# Altium PCB obc.PcbDoc
Units mm, origin at the board's own origin, x right, y up, seen from the top; angles counter-clockwise.
Board outline 60 x 35 mm, 4 copper layers (Top Layer, GND, +3V3, Bottom Layer), stack 0.463 mm thick; 77 components, 67 nets, 306 pads, 141 vias.
Unrouted connection lines stored in the file: 86.
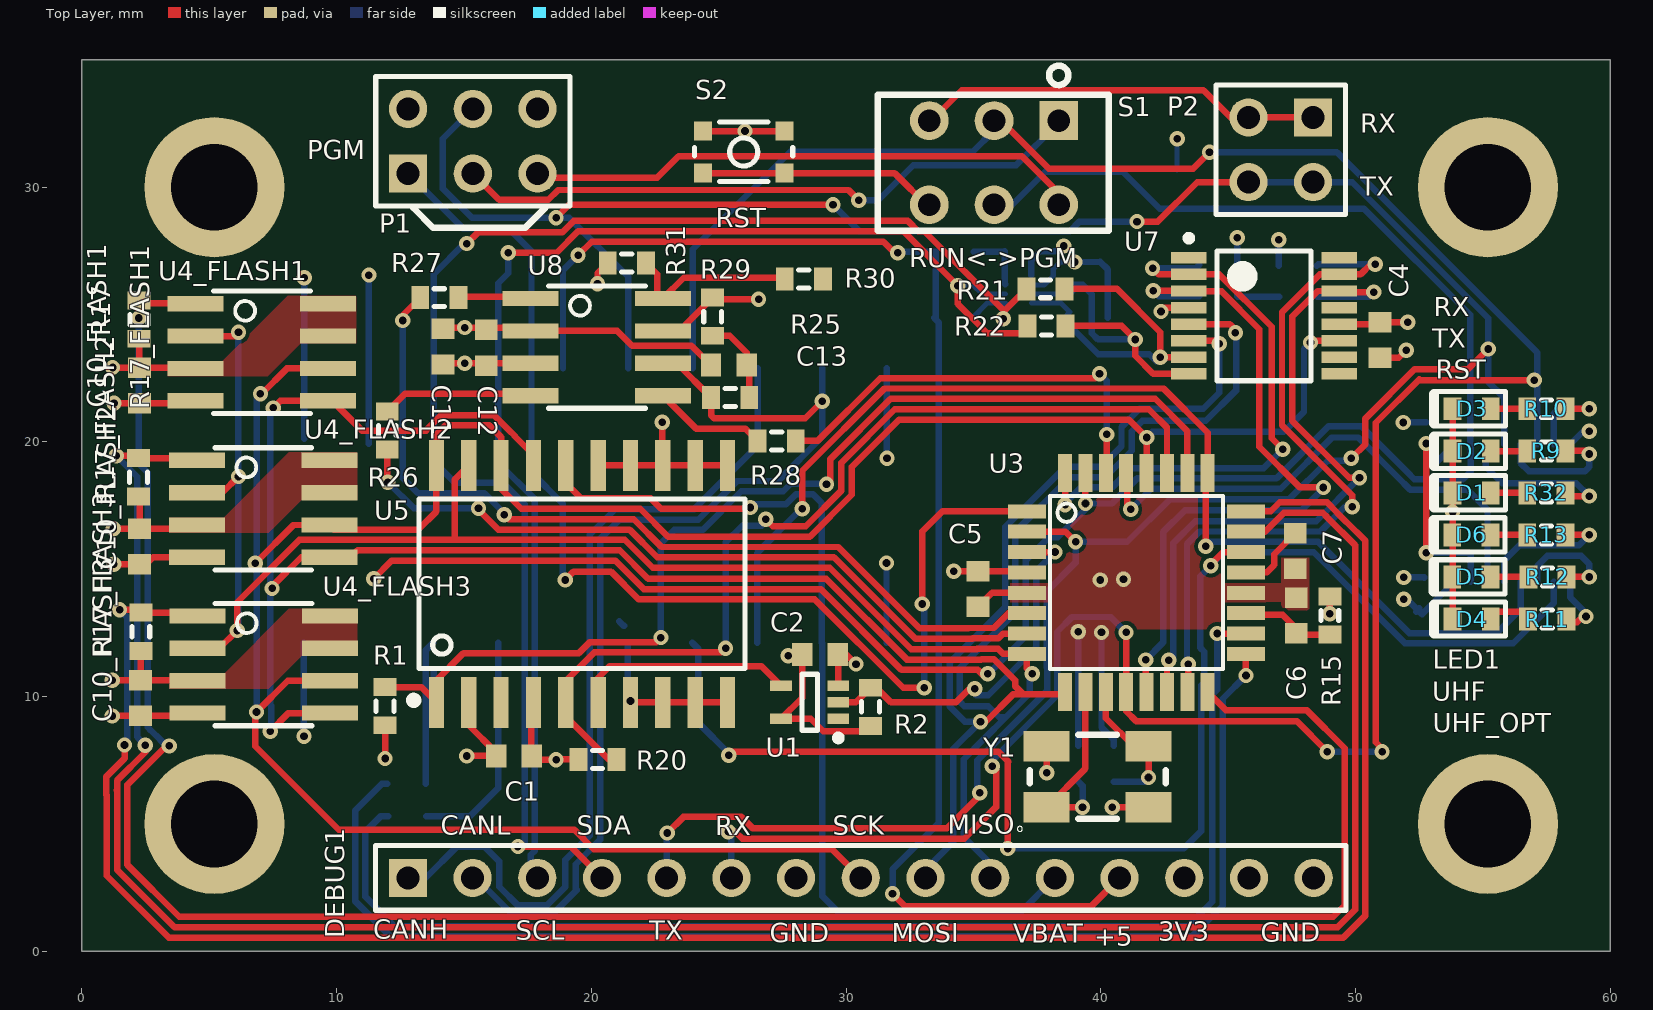
[diagram p0: Top Layer view]
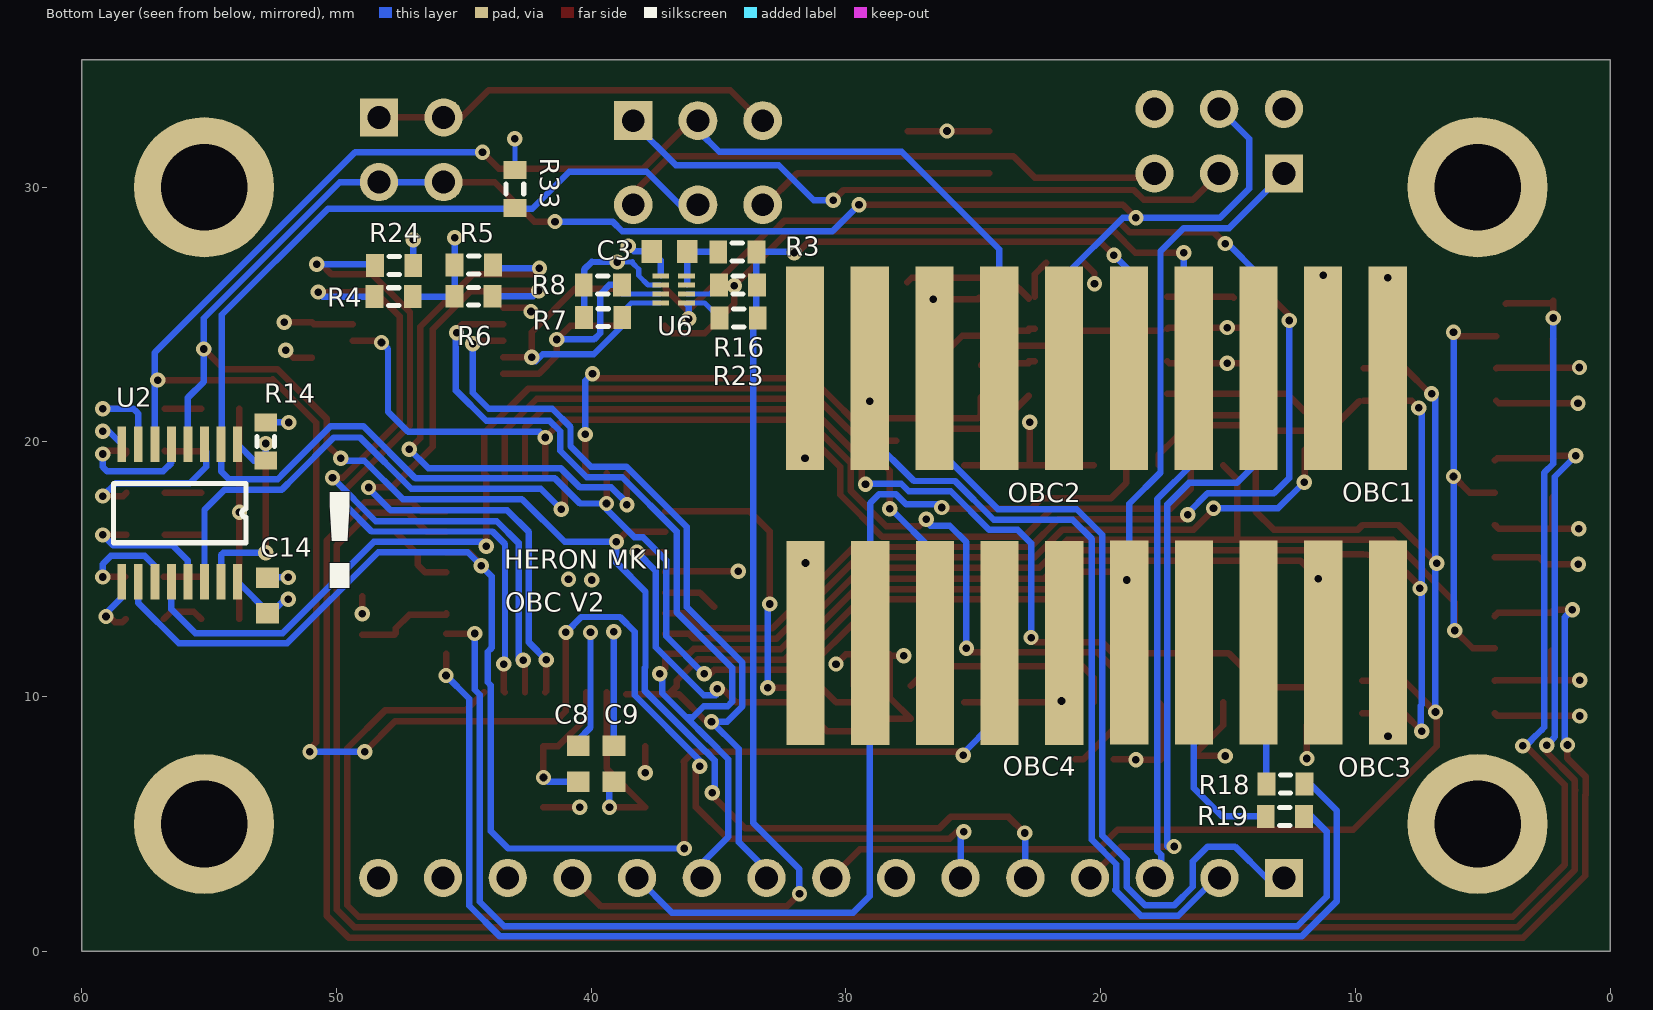
[diagram p1: Bottom Layer view, seen from below]
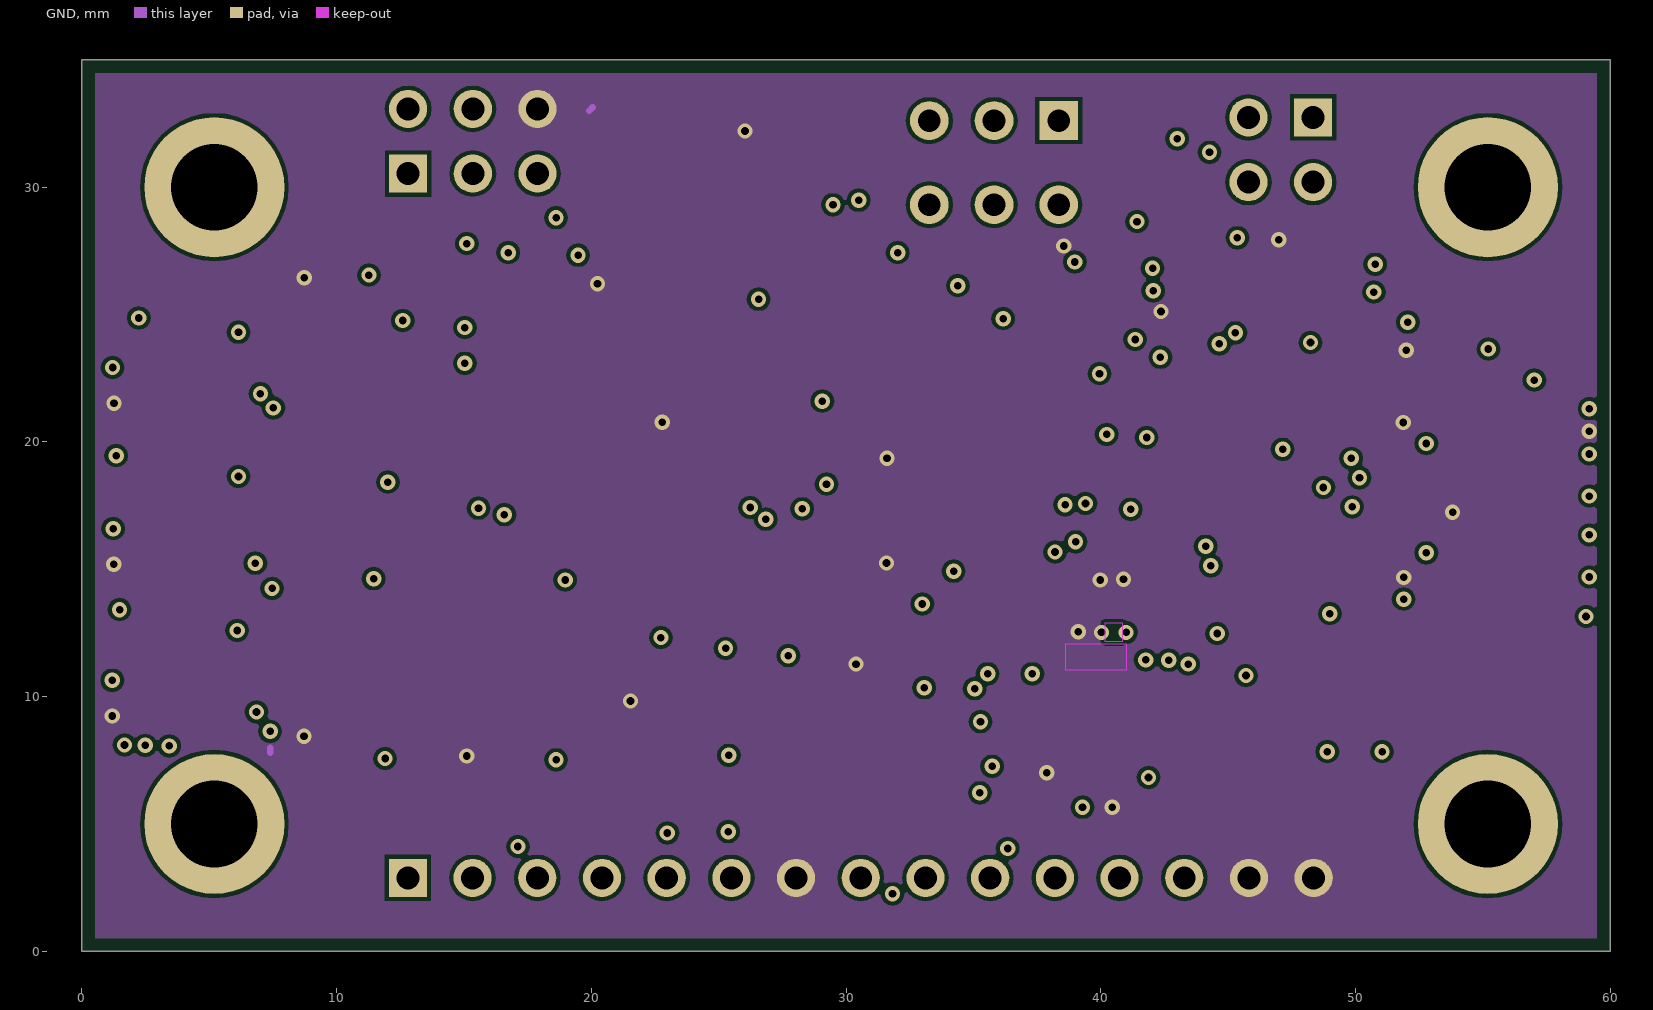
[diagram p2: GND]
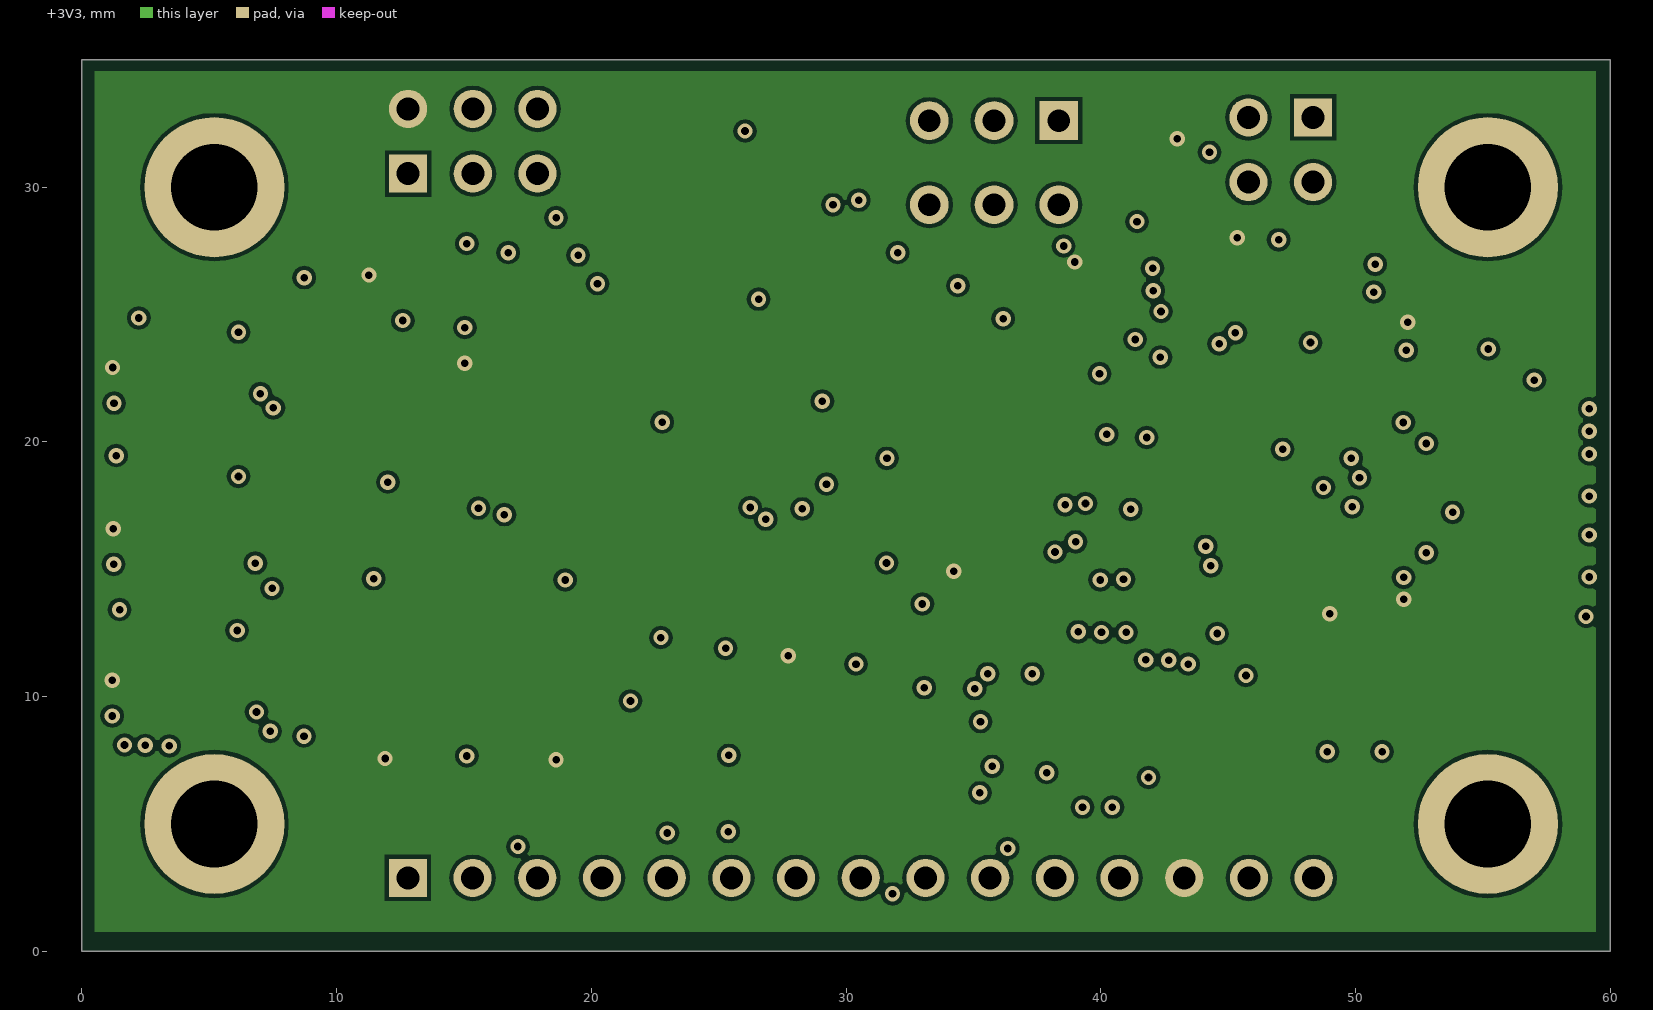
[diagram p3: +3V3]

## Layer stack, top to bottom
Top Solder: solder mask 0.0102, Solder Resist, Dk 3.5
Top Layer: signal copper 0.0356
GND: signal copper 0.036
+3V3: signal copper 0.036
Dielectric 1: dielectric 0.32, FR-4, Dk 4.8
Bottom Layer: signal copper 0.0356
Bottom Solder: solder mask 0.0102, Solder Resist, Dk 3.5

## Board outline
0,0 0,35 60,35 60,0

## Design rules (kind name [scope] priority, off if disabled: settings)
AssemblyTestPointUsage [All] p1 off:
AssemblyTestpoint [All] p1 off: testpointundercomponent=TRUE minsize=1.016 maxsize=2.54 preferedsize=1.524 minholesize=0 maxholesize=1.016 preferedholesize=0.813 testpointgrid=0.025 usegrid=TRUE gridtolerance=0 allowsidetop=TRUE allowsidebottom=TRUE
BoardOutlineClearance [OnLayer('VCC') or OnLayer('GND')] p1: gap=0.508 ignorepadtopadclearanceinfootprint=FALSE // Inner layer clearance
BoardOutlineClearance BoardOutlineClearance_1 [All] p2: gap=0.381 ignorepadtopadclearanceinfootprint=FALSE // top and bottom layers
Clearance [All] p1: gap=0.152 ignorepadtopadclearanceinfootprint=FALSE
FabricationTestPointUsage [All] p1 off: valid=0 allowmultiple=FALSE
FabricationTestpoint [All] p1 off: side=3 testpointundercomponent=FALSE minsize=1.016 maxsize=2.54 preferedsize=1.524 minholesize=0 maxholesize=1.016 preferedholesize=0.813 testpointgrid=0.025 allowsidetop=TRUE allowsidebottom=TRUE usegrid=TRUE gridtolerance=0
Height [All] p1: minheight=0 maxheight=15 prefheight=12.7
HoleSize [All] p1: absolutevalues=TRUE maxlimit=6.3 minlimit=0.3 maxpercent=80.000 minpercent=20.000
HoleToHoleClearance [All] p1: gap=0.254 allowstackedmicrovias=FALSE
MinimumAnnularRing [All] p1: minimumring=0.15
MinimumSolderMaskSliver [All] p1: minsoldermaskwidth=0.102
PlaneConnect [All] p1: planeconnectstyle=Direct reliefexpansion=0.508 reliefentries=4 reliefconductorwidth=0.254 reliefairgap=0.254
PolygonConnect [All] p1: connectstyle=Direct reliefconductorwidth=0.254 reliefentries=4 polygonreliefangle="90 Angle" airgapwidth=0.254
RoomDefinition ATMega32M1 [InComponentClass('ATMega32M1')] p1: confinementstyle=ConfineIn formatcopy=TRUE lockcomponents=FALSE outline 34.325,12.72 34.325,15.728 36.035,15.728 36.035,19.845 42.148,19.845 42.148,31.435 43.856,31.435 43.856,19.845 46.769,19.845 46.769,17.225 48.492,17.225 48.492,14.691 49.851,14.691 49.851,11.683 46.769,11.683 46.769,9.111 43.446,9.111 43.446,4.29 36.31,4.29 36.31,9.111 36.035,9.111 36.035,12.72
RoomDefinition U_obc_spi_to_i2c [InComponentClass('U_obc_spi_to_i2c')] p2: confinementstyle=ConfineIn formatcopy=TRUE lockcomponents=FALSE outline 32.71,24.013 32.71,25.721 32.735,25.721 32.735,27.016 32.761,27.016 32.761,28.311 35.428,28.311 35.428,28.337 42.231,28.337 42.231,28.504 50.589,28.504 50.589,25.505 51.818,25.505 51.818,22.497 50.589,22.497 50.589,21.871 42.231,21.871 42.231,23.7 36.367,23.7 36.367,24.013
RoomDefinition obc_main_3.0 [InComponentClass('obc_main_3.0')] p3: confinementstyle=ConfineIn formatcopy=TRUE lockcomponents=FALSE outline 7.652,7.804 7.652,16.439 7.663,16.439 7.663,27.207 20.379,27.207 20.379,27.21 32.674,27.21 32.674,4.509 49.984,4.509 49.984,1.261 11.176,1.261 11.176,7.804
RoomDefinition FLASH3 [InComponentClass('FLASH3')] p4: confinementstyle=ConfineIn formatcopy=TRUE lockcomponents=FALSE outline 1.444,8.439 1.444,11.447 1.462,11.447 1.462,14.052 3.17,14.052 3.17,14.016 11.153,14.016 11.153,8.505 3.152,8.505 3.152,8.439
RoomDefinition FLASH2 [InComponentClass('FLASH2')] p5: confinementstyle=ConfineIn formatcopy=TRUE lockcomponents=FALSE outline 1.366,17.109 1.366,20.117 3.104,20.117 3.104,20.129 11.139,20.129 11.139,14.618 3.119,14.618 3.119,14.392 1.411,14.392 1.411,17.109
RoomDefinition FLASH1 [InComponentClass('FLASH1')] p6: confinementstyle=ConfineIn formatcopy=TRUE lockcomponents=FALSE outline 1.386,23.296 1.386,26.304 3.094,26.304 3.094,26.276 11.088,26.276 11.088,20.765 3.115,20.765 3.115,20.716 1.407,20.716 1.407,23.296
RoomDefinition U_obc_rtc [InComponentClass('U_obc_rtc')] p7: confinementstyle=ConfineIn formatcopy=TRUE lockcomponents=FALSE outline 11.051,8.123 11.051,11.131 12.476,11.131 12.476,20.395 26.388,20.395 26.388,12.513 30.485,12.513 30.485,11.408 30.654,11.408 30.654,11.105 31.817,11.105 31.817,8.097 30.654,8.097 30.654,7.875 21.748,7.875 21.748,6.681 18.74,6.681 18.74,6.817 15.463,6.817 15.463,8.123
RoomDefinition U_micro-circuit-ATMEGA32M1 [InComponentClass('U_micro-circuit-ATMEGA32M1')] p8: confinementstyle=ConfineIn formatcopy=TRUE lockcomponents=FALSE outline 10.015,28.912 10.015,34.7 30.858,34.7 30.858,35.154 40.688,35.154 40.688,34.364 50.618,34.364 50.618,28.576 40.688,28.576 40.688,27.915 30.858,27.915 30.858,28.912
RoomDefinition U_can-SN65HVD233 [InComponentClass('U_can-SN65HVD233')] p9: confinementstyle=ConfineIn formatcopy=TRUE lockcomponents=FALSE outline 11.135,18.943 11.135,21.951 12.529,21.951 12.529,26.517 19.891,26.517 19.891,27.883 22.899,27.883 22.899,27.253 29.85,27.253 29.85,25.545 28.784,25.545 28.784,19.187 12.843,19.187 12.843,18.943
RoomDefinition micro-circuit- [InComponentClass('micro-circuit-')] p10: confinementstyle=ConfineIn formatcopy=TRUE lockcomponents=FALSE outline 51.943,11.938 59.182,11.938 59.182,22.352 51.943,22.352
RoutingVias [All] p1: holewidth=0.3 width=0.6 viastyle="Through Hole" minholewidth=0.2 minwidth=0.6 maxholewidth=6.3 maxwidth=10
SilkToSilkClearance [All] p1: silktosilkclearance=0
SilkToSolderMaskClearance [IsPad] p1: minsilkscreentomaskgap=0.076 clearancetoexposedcopper=TRUE
SolderMaskExpansion [All] p1: expansion=0.064
UnConnectedPin [All] p1:
UnRoutedNet [All] p1: checkbadconnections=TRUE
Width [All] p1: maxlimit=2.54 minlimit=0.152 preferedwidth=0.254
18 further rules are at their usual default settings.

## Classes and differential pairs
component class U_obc_spi_to_i2c: C3 C4 R3 R4 R5 R6 R7 R8 R16 R21 R22 R23 R24 U6 U7
channel class obc_flash: FLASH1 FLASH2 FLASH3
component class micro-circuit-: C14 D1 D2 D3 D4 D5 D6 R9 R12 R14 R26 R27 R29 R32 U2
component class ATMega32M1: C5 C6 C7 C8 C9 R15 R33 U3 Y1
net class CS_MEM[1..3]: CS_MEM1 CS_MEM2 CS_MEM3
component class U_obc_rtc: C1 C2 R1 R2 R20 U1 U5
component class U_can-SN65HVD233: C11 C12 C13 R25 R26 R27 R28 R29 R30 R31 U8
component class U_micro-circuit-ATMEGA32M1: P1 P2 P3 S1 S2
component class obc_main_3.0: DEBUG1 OBC1 OBC2 OBC3 OBC4 R18 R19
component class FLASH3: C10_FLASH3 R17_FLASH3 R33_FLASH3 U4_FLASH3
component class FLASH2: C10_FLASH2 R17_FLASH2 R33_FLASH2 U4_FLASH2
component class FLASH1: C10_FLASH1 R17_FLASH1 R33_FLASH1 U4_FLASH1

## Components (designator, comment, footprint, x,y, rotation, side; value= is the part's Value field where it differs from the comment)
C1 "0.1uF" 1608[0603] 16.967,7.671 r0 top
C2 "0.1uF" 1608[0603] 28.981,11.659 r180 top
C3 "0.1uF" 1608[0603] 36.932,27.483 r180 bottom
C4 "0.1uF" 1608[0603] 50.964,24.001 r90 top
C5 "0.1uF" 1608[0603] 35.179,14.224 r90 top
C6 "0.1uF" 1608[0603] 47.676,13.187 r270 top value=100nF
C7 "0.1uF" 1608[0603] 47.638,15.721 r270 top
C8 "15pF 1%" 1608[0603] 40.513,7.366 r270 bottom value="14pF 1%"
C9 "15pF 1%" 1608[0603] 39.116,7.366 r270 bottom value="14pF 1%"
C10_FLASH1 "0.1uF" 1608[0603] 2.261,22.22 r270 top (schematic designator C10)
C10_FLASH2 "0.1uF" 1608[0603] 2.265,15.896 r270 top (schematic designator C10)
C10_FLASH3 "0.1uF" 1608[0603] 2.298,9.943 r270 top (schematic designator C10)
C11 "10uF" 1608[0603] 14.173,23.738 r90 top
C12 "0.1uF" 1608[0603] 15.875,23.698 r90 top
C13 "47pF" 1608[0603] 25.4,23.012 r0 top
C14 "0.1uF" 1608[0603] 52.705,13.97 r270 bottom
D1 "GREEN LED" 0603-LED 54.565,18.001 r180 top
D2 "ORANGE LED" 0603-LED 54.565,19.637 r180 top
D3 "ORANGE LED" 0603-LED 54.565,21.303 r180 top
D4 "" 0603-LED 54.565,13.048 r180 top
D5 "" 0603-LED 54.553,14.699 r180 top
D6 "" 0603-LED 54.553,16.35 r180 top
DEBUG1 "Header 15" HDR1X15 12.8,2.885 r0 top
OBC1 "X- Y+" 70AAJ-5-M0 18.89,22.89 r180 bottom
OBC2 "X+ Y+" 70AAJ-5-M0 31.607,22.892 r180 bottom
OBC3 "X- Y-" 70AAJ-5-M0 18.88,12.122 r180 bottom
OBC4 "X+ Y-" 70AAJ-5-M0 31.59,12.11 r180 bottom
P1 "Header 3X2" HDR2X3 12.809,30.536 r0 top
P2 "Header 2X2" HDR2X2 48.34,32.74 r180 top
R1 "10K" J1-0603 11.905,9.627 r270 top
R2 "10K" J1-0603 30.963,9.601 r270 top
R3 "200K" J1-0603 34.265,27.457 r180 bottom
R4 "10K" J1-0603 47.756,25.705 r180 bottom
R5 "10K" J1-0603 44.615,26.949 r0 bottom
R6 "10K" J1-0603 44.622,25.719 r0 bottom
R7 "4.7K" J1-0603 39.532,24.88 r0 bottom
R8 "4.7K" J1-0603 39.548,26.162 r0 bottom
R9 "330" J1-0603 57.498,19.652 r0 top
R10 "330" J1-0603 57.498,21.303 r0 top
R11 "330" J1-0603 57.531,13.048 r0 top
R12 "330" J1-0603 57.543,14.699 r0 top
R13 "330" J1-0603 57.498,16.35 r0 top
R14 "10K" J1-0603 52.781,20.015 r270 bottom
R15 "30K" J1-0603 48.997,13.187 r90 top value=10
R16 "4.7K" J1-0603 34.239,26.162 r180 bottom
R17_FLASH1 "10K" J1-0603 2.24,24.8 r270 top (schematic designator R17)
R17_FLASH2 "10K" J1-0603 2.22,18.613 r270 top (schematic designator R17)
R17_FLASH3 "10K" J1-0603 2.316,12.548 r270 top (schematic designator R17)
R18 "100" J1-0603 12.744,6.571 r180 bottom
R19 "100" J1-0603 12.773,5.298 r180 bottom
R20 "10K" J1-0603 20.244,7.535 r180 top
R21 "Res3" J1-0603 37.833,26.01 r180 top value="0 Ohm"
R22 "Res3" J1-0603 37.871,24.554 r180 top value="0 Ohm"
R23 "4.7K" J1-0603 34.214,24.867 r180 bottom
R24 "10K" J1-0603 47.737,26.924 r0 bottom
R25 "60" J1-0603 25.451,21.745 r0 top
R26 "100" J1-0603 11.989,20.447 r270 top
R27 "100" J1-0603 14.033,25.663 r180 top
R28 "100" J1-0603 27.28,20.041 r0 top
R29 "60" J1-0603 24.765,24.917 r270 top
R30 "0" J1-0603 28.346,26.399 r180 top
R31 "0" J1-0603 21.395,27.029 r0 top
R32 "330" J1-0603 57.498,18.001 r0 top
R33 "30K" J1-0603 43.002,29.931 r90 bottom
S1 "DPDT" "JS202011AQN - Slide Switch" 35.811,30.963 r270 top
S2 "SW-PB" "PTS830GM140 SMTR LFS - Pushbutton" 25.984,31.381 r180 top
U1 "SN74LVC1G07" SOT65P210X110-5N 28.575,9.779 r180 top
U2 "Hex Buffer" SOP65P640X120-16N 53.885,19.906 r270 bottom
U3 "ATMega32M1" QFP80P900X900X120-32 41.402,14.478 r0 top
U4_FLASH1 "SST26VF016B" SOIC127P500X600-8N 7.07,23.52 r270 top (schematic designator U4)
U4_FLASH2 "SST26VF016B" SOIC127P500X600-8N 7.121,17.374 r270 top (schematic designator U4)
U4_FLASH3 "SST26VF016B" SOIC127P500X600-8N 7.136,11.26 r270 top (schematic designator U4)
U5 "DS3234" SOIC127P1032X265-20 19.634,14.427 r90 top
U6 "PCA9306DQER" SON35P100X140X40-8N 36.768,25.984 r180 bottom
U7 "SC18IS600IPW/S8HP" TSOP65P640X110-16N 46.41,24.95 r0 top
U8 "SN65HVD233D" SOIC127P500X600-8N 20.218,23.724 r270 top
Y1 "8MHz Crystal" OSCSC500X320X110-4N 39.878,6.858 r90 top

## Footprints (in the part's own frame and the unit in brackets; to place one, negate y for a bottom-side part, rotate by r counter-clockwise, add the part's x,y. Pads: shape width x height; smd on the part's side, far side on the other; paste and mask are expansions set on the pad)
70AAJ-5-M0 [mm] "5 Pin Butterfly Connecter"
  rect 1.5x8 smd: 1(0,0) 2(2.54,0) 3(5.08,0) 4(7.62,0) 5(10.16,0)
0603-LED [mm] "0603 LED footprint, thick line on the cathode"
  rect 0.7x0.9 smd: 1(-0.75,0) 2(0.75,0)
  silkscreen extent -1.32,-0.67 1.5,0.67, body extent -0.8,-0.4 0.8,0.4, height 0.71
1608[0603] [mm] "Chip Capacitor, Body 1.6x0.8mm, IPC High Density"
  rect 0.8x0.9 smd: 1(-0.7,0) 2(0.7,0)
  body extent -0.87,-0.48 0.87,0.48, height 1.3
HDR1X15 [mm] "Connector; Header; 15 Position"
  rect 1.5x1.5 hole 0.9: 1(0,0)
  round 1.5 hole 0.9: 2(2.54,0) 3(5.08,0) 4(7.62,0) 5(10.16,0) 6(12.7,0) 7(15.24,0) 8(17.78,0) 9(20.32,0) 10(22.86,0) 11(25.4,0) 12(27.94,0) 13(30.48,0) 14(33.02,0) 15(35.56,0)
  silkscreen extent -1.27,-1.27 36.83,1.27
HDR2X2 [mm] "Connector; Header; 2x2 Position"
  rect 1.5x1.5 hole 0.9: 1(0,0)
  round 1.5 hole 0.9: 2(0,2.54) 3(2.54,0) 4(2.54,2.54)
  silkscreen extent -1.27,-1.27 3.81,3.81
HDR2X3 [mm] "Connector; Header; 3x2 Position"
  rect 1.5x1.5 hole 0.9: 1(0,0)
  round 1.5 hole 0.9: 2(0,2.54) 3(2.54,0) 4(2.54,2.54) 5(5.08,0) 6(5.08,2.54)
  silkscreen extent -1.27,-1.27 6.35,3.81
J1-0603 [mm] "Chip Resistor, Body 1.6x0.8mm, IPC High Density"
  rect 0.7x0.9 smd: 1(-0.75,0) 2(0.75,0)
  silkscreen extent -0.2,-0.35 0.2,0.35, body extent -0.85,-0.48 0.85,0.48, height 0.9
"JS202011AQN - Slide Switch" [mil]
  rect 60x60 hole 35: 1(-65,100)
  round 60 hole 35: 2(-65,0) 3(-65,-100) 4(65,100) 5(65,0) 6(65,-100)
  silkscreen extent -150,-180 105,177, body extent -148,-178 73,176, height 139
OSCSC500X320X110-4N [mm] "ABM3B-8.000MHZ-10-D-1-G-T Abracon 8MHz crystal"
  rect 1.2x1.8 smd: 1(-1.2,2) 2(-1.2,-2) 3(1.2,-2) 4(1.2,2)
  silkscreen extent -2.15,-2.67 1.65,3.15, body extent -1.6,-2.5 1.58,2.5, height 1.1
"PTS830GM140 SMTR LFS - Pushbutton" [mm] "Low profile pushbutton"
  rect 0.7x0.75 smd: 1(-1.6,0.825) 1(1.6,0.825) 2(-1.6,-0.825) 2(1.6,-0.825)
  silkscreen extent -1.92,-1.17 1.92,1.15, body extent -1.75,-1.3 1.75,1.3, height 1.4
QFP80P900X900X120-32 [mm] "QFN + Pitch P + Body With X Body Length X Height - #Pins"
  rect 1.5x0.55 smd: 1(-4.3,2.8) 2(-4.3,2) 3(-4.3,1.2) 4(-4.3,0.4) 5(-4.3,-0.4) 6(-4.3,-1.2) 7(-4.3,-2) 8(-4.3,-2.8) 17(4.3,-2.8) 18(4.3,-2) 19(4.3,-1.2) 20(4.3,-0.4) 21(4.3,0.4) 22(4.3,1.2) 23(4.3,2) 24(4.3,2.8)
  rect 0.55x1.5 smd: 9(-2.8,-4.3) 10(-2,-4.3) 11(-1.2,-4.3) 12(-0.4,-4.3) 13(0.4,-4.3) 14(1.2,-4.3) 15(2,-4.3) 16(2.8,-4.3) 25(2.8,4.3) 26(2,4.3) 27(1.2,4.3) 28(0.4,4.3) 29(-0.4,4.3) 30(-1.2,4.3) 31(-2,4.3) 32(-2.8,4.3)
  silkscreen extent -3.4,-3.4 3.4,3.4, body extent -4.62,-4.62 4.63,4.63, height 1.2
SOIC127P500X600-8N [mm]
  rect 0.6x2.2 smd: 1(-1.905,-2.6) 2(-0.635,-2.6) 3(0.635,-2.6) 4(1.905,-2.6) 5(1.905,2.6) 6(0.635,2.6) 7(-0.635,2.6) 8(-1.905,2.6)
  silkscreen extent -2.4,-1.9 2.4,1.9, body extent -2.46,-2.67 2.44,2.69, height 2.03
SOIC127P1032X265-20 [mm] "SOIC127P + Nominal Lead Length X Height - Pin #"
  rect 2x0.6 smd: 1(-4.65,5.715) 2(-4.65,4.445) 3(-4.65,3.175) 4(-4.65,1.905) 5(-4.65,0.635) 6(-4.65,-0.635) 7(-4.65,-1.905) 8(-4.65,-3.175) 9(-4.65,-4.445) 10(-4.65,-5.715) 11(4.65,-5.715) 12(4.65,-4.445) 13(4.65,-3.175) 14(4.65,-1.905) 15(4.65,-0.635) 16(4.65,0.635) 17(4.65,1.905) 18(4.65,3.175) 19(4.65,4.445) 20(4.65,5.715)
  silkscreen extent -4.72,-6.4 3.32,6.75
SON35P100X140X40-8N [mil]
  rect 26x8 smd: 1(-20,21) 2(-20,7) 3(-20,-7) 4(-20,-21) 5(20,-21) 6(20,-7) 7(20,7) 8(20,21)
SOP65P640X120-16N [mm] "SOP + Pitch P + Lead Span Nominal X Height - #Pins"
  rect 1.4x0.35 smd: 1(0,0) 2(0,-0.65) 3(0,-1.3) 4(0,-1.95) 5(0,-2.6) 6(0,-3.25) 7(0,-3.9) 8(0,-4.55) 9(5.4,-4.55) 10(5.4,-3.9) 11(5.4,-3.25) 12(5.4,-2.6) 13(5.4,-1.95) 14(5.4,-1.3) 15(5.4,-0.65) 16(5.4,0)
  silkscreen extent 1.53,-4.88 3.87,0.33, body extent -0.61,-4.84 5.99,0.27, height 1.2
SOT65P210X110-5N [mm] "SOT23, 5-Leads, Body 2.00x2.10mm, Pitch 0.65mm, IPC Medium Density"
  rect 0.85x0.4 smd: 1(-1.125,0.65) 2(-1.125,0) 3(-1.125,-0.65) 4(1.125,-0.65) 5(1.125,0.65)
  silkscreen extent -1.25,-1.1 0.3,1.52, body extent -1.2,-1.07 1.2,1.07, height 1.1
TSOP65P640X110-16N [mm] "TSOP, 16-Leads, Body 5.00x4.40mm, Pitch 0.65mm, IPC Medium Density"
  rect 1.4x0.45 smd: 1(-2.95,2.275) 2(-2.95,1.625) 3(-2.95,0.975) 4(-2.95,0.325) 5(-2.95,-0.325) 6(-2.95,-0.975) 7(-2.95,-1.625) 8(-2.95,-2.275) 9(2.95,-2.275) 10(2.95,-1.625) 11(2.95,-0.975) 12(2.95,-0.325) 13(2.95,0.325) 14(2.95,0.975) 15(2.95,1.625) 16(2.95,2.275)
  silkscreen extent -3.07,-2.55 1.85,3.17, body extent -3.2,-2.55 3.2,2.55, height 1.1

## Part data
C1 C2 C3 C4: library part Cap, "Capacitor", LatestRevisionDate=17-Jul-2002, LatestRevisionNote="Re-released for DXP Platform.", PackageDescription="Radial Cap, Thru-Hole; 2 Leads; 0.3 in Pin Spacing", PackageReference=RAD-0.3, Published=8-Jun-2000, Publisher="Altium Limited"
C5 C6 C7 C12: library part "Cap Semi", "Capacitor (Semiconductor SIM Model)", Supplier Part Number=587-3807-1-ND, LatestRevisionDate=29-May-2009, LatestRevisionNote="IPC-7351 Footprint Added.", PackageDescription="Chip Capacitor", PackageReference=C1206, Published=8-Jun-2000, Publisher="Altium Limited", Supplier=Digi-Key
C8 C9: library part "Cap Semi", "Capacitor (Semiconductor SIM Model)", Supplier Part Number=490-16416-1-ND, LatestRevisionDate=29-May-2009, LatestRevisionNote="IPC-7351 Footprint Added.", PackageDescription="Chip Capacitor", PackageReference=C1206, Published=8-Jun-2000, Publisher="Altium Limited", Supplier=Digi-Key
C10_FLASH1 C10_FLASH2 C10_FLASH3 C14: library part "Cap Semi", "Capacitor (Semiconductor SIM Model)", LatestRevisionDate=29-May-2009, LatestRevisionNote="IPC-7351 Footprint Added.", PackageDescription="Chip Capacitor", PackageReference=C1206, Published=8-Jun-2000, Publisher="Altium Limited"
C11: library part "Cap Semi", "Capacitor (Semiconductor SIM Model)", Supplier Part Number=587-3258-1-ND, LatestRevisionDate=29-May-2009, LatestRevisionNote="IPC-7351 Footprint Added.", PackageDescription="Chip Capacitor", PackageReference=C1206, Published=8-Jun-2000, Publisher="Altium Limited", Supplier=Digi-Key
C13: library part "Cap Semi", "Capacitor (Semiconductor SIM Model)", Supplier Part Number=587-5087-1-ND, LatestRevisionDate=29-May-2009, LatestRevisionNote="IPC-7351 Footprint Added.", PackageDescription="Chip Capacitor", PackageReference=C1206, Published=8-Jun-2000, Publisher="Altium Limited", Supplier=Digi-Key
D1 D2 D3 D4 D5 D6: library part LED, "Just a generic LED"
DEBUG1: "Header, 15-Pin", LatestRevisionDate=17-Jul-2002, LatestRevisionNote="Re-released for DXP Platform.", Publisher="Altium Limited"
OBC1 OBC2 OBC3 OBC4: library part 70AAJ-5-M0, Supplier Part Number 1=70AAJ-5-M0-ND, Supplier 1=Digi-Key
P1: "Header, 3-Pin, Dual row. Programming header", LatestRevisionDate=17-Jul-2002, LatestRevisionNote="Re-released for DXP Platform.", Publisher="Altium Limited", Supplier=Digi-Key
P2: "Header, 2-Pin, Dual row", LatestRevisionDate=17-Jul-2002, LatestRevisionNote="Re-released for DXP Platform.", Publisher="Altium Limited"
R1 R2 R3 R4 R5 R6 R7 R8 R9 R10 R11 R12 R13 R14 R15 R16 R17_FLASH1 R17_FLASH2 R17_FLASH3 R18 R19 R20 R23 R24 R25 R26 R27 R28 R29 R30 R31 R32 R33: library part Res3, "Resistor", LatestRevisionDate=29-May-2009, LatestRevisionNote="IPC-7351 Footprint Added.", PackageDescription="Chip Resistor", PackageReference=J1-0603, Published=8-Jun-2000, Publisher="Altium Limited"
  R15 R25 R26 R27 R28 R29 R30 R31 R33: Supplier=Digi-Key
R21 R22: "Optional for connecting 3.3V I2C", LatestRevisionDate=29-May-2009, LatestRevisionNote="IPC-7351 Footprint Added.", PackageDescription="Chip Resistor", PackageReference=J1-0603, Published=8-Jun-2000, Publisher="Altium Limited"
S1: library part "DPDT Switch", "DPDT Switch, customized for the pinout of the JS202011AQN switch.", Supplier Part Number 1=401-2000-ND, Supplier 1=Digi-Key
S2: library part "Pushbutton - Low Profile", "Schematic symbol for a generic 2-pin pushbutton, OFF-mom."
U1: "Single element non-inverting open drain buffer", Supplier Part Number 1=296-8486-1-ND, Supplier 1=Digi-Key
U2: library part SN74HC365PW, "Hex non-inverting buffer with 3-state outputs. SN74HC365PW.", Supplier Part Number 1=296-33932-5-ND, Supplier 1=Digi-Key
U3: "Atmel 8-bit AVR microcontroller.", Supplier Part Number 1=ATMEGA32M1-AURCT-ND, Supplier 1=Digi-Key
U4_FLASH1 U4_FLASH2 U4_FLASH3: "2.5V/3.0V 16 Mbit Serial Quad I/O (SQI) Flash Memory", Supplier Part Number 1=SST26VF016B-104I/SN-ND, ComponentLink1Description=SST25VF016B, ComponentLink1URL=https://www.digikey.ca/product-detail/en/microchip-technology/SST26VF016B-104I-SN/SST26VF016B-104I-SN-ND/5033651, Supplier 1=Digi-Key
U5: "SPI bus RTC with integrated crystal and SRAM", Supplier Part Number 1=DS3234SN#-ND, Supplier 1=Digi-Key
U6: "Dual Bi-Directional I2C-Bus and SMBus Voltage Level-Translator 8-X2SON -40 to 85", Package="XFDFN-8 Texas Instruments", Supplier Part Number 1=296-27957-1-ND, Availability=Unavailable, MF="Texas Instruments", MP=PCA9306DQER, Price=None, SnapEDA_Link=https://www.snapeda.com/parts/PCA9306DQER/Texas%20Instruments/view-part/?ref=snap, Supplier 1=Digi-Key
U7: "SPI to I2C bridge.", Supplier Part Number 1=568-13690-1-ND, Supplier 1=Digikey
U8: "3.3V CAN Transceiver with Standby Mode, Loop-back 8-SOIC -40 to 125", Package="SOIC-8 Texas Instruments", Supplier Part Number 1=296-14639-5-ND, Availability=Good, MF="Texas Instruments", MP=SN65HVD233D, Price="2.39 USD", SnapEDA_Link=https://www.snapeda.com/parts/SN65HVD233D/Texas%20Instruments/view-part/?ref=snap, Supplier 1=Digi-Key
Y1: library part AMB3B-8MHz, "8MHz Abracom 4-pin crystal.", Supplier Part Number 1=535-13456-1-ND, Supplier 1=Digi-Key

## Free pads (board coordinates)
  round 5.5 hole 3.4 unplated: 1(5.2,5) 2(55.2,5) 3(5.2,30) 4(55.2,30)

## Via types
v1: diameter 0.6, hole 0.3, Top Layer to Bottom Layer, tented both sides, 141 vias

## Nets (pads, with @x,y where several pads share a name; then routed paths per layer and width w, separated by ;. In a path a pad name is that pad's centre, name@x,y a point inside that pad or via, vN(x,y) a via of type N, cw(c..) or ccw(c..) an arc to the next point about the centre after c; other vN are vias at no path point)
+3V3: C1.2 C2.2 C4.2 C5.2 C10_FLASH1.1 C10_FLASH2.1 C10_FLASH3.1 C11.1 C12.1 C14.2 DEBUG1.13 OBC1.4 P1.2 R1.2 R2.2 R4.2 R5.2 R6.2 R7.2 R8.2 R15.2 R17_FLASH1.2 R17_FLASH2.2 R17_FLASH3.2 R20.2 R33.2 U1.5 U2.16 U3.4 U4_FLASH1.3 U4_FLASH1.7 U4_FLASH1.8 U4_FLASH2.3 U4_FLASH2.7 U4_FLASH2.8 U4_FLASH3.3 U4_FLASH3.7 U4_FLASH3.8 U5.4 U6.2 U7.12 U8.3 | length 56.3
  Top Layer w0.254: v1(1.194,10.643) C10_FLASH3.1 ; v1(1.206,22.92) C10_FLASH1.1 ; v1(1.229,16.596) C10_FLASH2.1 ; R17_FLASH2.2 2.265,17.818 C10_FLASH2.1 ; R17_FLASH1.2 2.261,24.029 C10_FLASH1.1 ; R17_FLASH3.2 2.316,10.66 C10_FLASH3.1 ; U4_FLASH1.3 4.436,22.92 C10_FLASH1.1 ; U4_FLASH2.3 4.379,16.596 C10_FLASH2.1 ; U4_FLASH3.3 4.518,10.643 C10_FLASH3.1 ; v1(11.905,7.571) R1.2 ; C11.1@14.224,23.089 v1(15.037,23.089) 17.314,23.089 U8.3@17.39,23.165 ; U5.4 17.642,9.69 17.642,7.518 v1(18.618,7.518) 18.635,7.535 R20.2 ; v1(27.737,11.608) 28.231,11.608 C2.2 28.281,9.96 U1.5 28.615,9.129 29.108,8.636 30.747,8.636 R2.2 ; v1(34.225,14.924) C5.2 37.056,14.924 U3.4 ; v1(48.997,13.259) R15.2 ; U7.12 50.889,24.625 C4.2 v1(52.057,24.701)
  Bottom Layer w0.2: U6.2 37.77,26.162 38.136,26.528 38.136,26.78 38.379,27.024 38.379,27.076 38.391,27.064 v1(38.982,27.064) ; R33.2 v1(43.002,31.902)
  Bottom Layer w0.254: OBC1.4@11.27,19.931 OBC1.4 v1(11.27,26.551) ; v1(38.982,27.064) 39.961,27.064 39.973,27.076 40.282,26.767 R7.2 ; v1(45.365,28.016) R5.2 45.365,25.727 R6.2 45.387,25.705 R4.2 ; v1@52.056,13.919 51.965,13.829 v1(51.892,13.829) 52.021,13.829 52.615,13.236 U2.16 ; C14.2@52.386,13.335 C14.2@52.513,13.462
+5V: DEBUG1.12 OBC1.1 R3.2 R16.2 R23.2 | length 54.8
  Top Layer w0.254: v1(19.482,27.33) 20.015,27.864 31.471,27.864 31.902,27.432 v1(32.029,27.432) ; v1(31.826,2.261) 32.325,1.762 39.617,1.762 DEBUG1.12
  Bottom Layer w0.254: OBC1.1 18.89,26.739 v1(19.482,27.33) ; v1(31.826,2.261) 31.826,3.226 33.65,5.05 33.65,14.679 33.646,14.684 33.646,15.164 33.65,15.169 33.65,24.68 R23.2 33.515,24.917 R3.2 32.055,27.457 v1(32.029,27.432)
+RTC_VBAT: DEBUG1.11 OBC4.2 U5.16 | length 36.9
  Top Layer w0.254: U5.16 18.999,18.39 19.609,17.78 22.333,17.78 22.74,17.374 26.187,17.374 v1(26.238,17.424)
  Bottom Layer w0.254: v1(26.238,17.424) 26.36,17.547 27.635,17.547 28.041,17.953 28.695,17.953 29.05,17.598 OBC4.2 29.069,12.091 29.069,2.173 29.718,1.524 36.839,1.524 DEBUG1.11
CANH: DEBUG1.1 OBC2.3 R29.1 U8.7 | length 38.4
  Top Layer w0.254: U8.7@22.59,24.435 U8.7@22.818,24.435 ; U8.7 23.457,24.359 R29.1 24.83,25.603 v1(26.568,25.603)
  Bottom Layer w0.254: DEBUG1.1 13.502,2.885 14.732,4.115 15.799,4.115 16.383,3.531 16.383,2.54 17.12,1.803 18.254,1.803 18.984,2.533 18.984,3.592 19.939,4.547 19.939,16.358 20.938,17.356 24.035,17.356 26.527,19.848 OBC2.3
CANL: DEBUG1.2 OBC2.2 R25.1 U8.6 | length 40.5
  Top Layer w0.254: U8.6@22.59,23.165 U8.6@22.818,23.165 ; U8.6 23.357,23.089 R25.1 24.701,21.047 24.818,20.93 28.397,20.93 v1(29.07,21.602)
  Bottom Layer w0.254: DEBUG1.2 15.463,2.885 16.951,1.397 18.422,1.397 19.431,2.406 19.431,2.418 19.391,2.459 19.391,3.423 20.345,4.378 20.345,16.189 21.106,16.95 24.203,16.95 25.719,18.466 27.33,18.466 29.067,20.202 OBC2.2
CS_MEM1: R17_FLASH1.1 U3.16 U4_FLASH1.1 | length 86.6
  Top Layer w0.254: v1(2.235,24.867) 2.235,25.544 R17_FLASH1.1 ; R17_FLASH1.1@2.24,25.448 4.067,25.448 U4_FLASH1.1@4.089,25.425 ; v1(3.429,8.066) 3.316,8.066 1.79,6.54 1.79,3.392 3.826,1.356 49.13,1.356 49.581,1.806 49.581,7.975 48.081,9.474 44.906,9.474 U3.16
  Bottom Layer w0.254: v1(2.235,24.867) 2.235,19.149 2.586,18.798 2.586,8.796 2.716,8.666 2.729,8.666 3.069,8.327 3.069,8.314 3.316,8.066 v1(3.429,8.066)
CS_MEM2: R17_FLASH2.1 U3.23 U4_FLASH2.1 | length 89.7
  Top Layer w0.254: v1(1.346,19.463) 2.12,19.463 R17_FLASH2.1 4.437,19.363 U4_FLASH2.1 ; v1(2.489,8.087) 2.489,7.814 1.383,6.708 1.383,6.331 1.372,6.319 1.383,6.307 1.383,3.205 3.639,0.949 49.299,0.949 49.987,1.638 49.987,15.951 49.474,16.464 49.462,16.464 48.884,17.041 48.884,17.054 48.717,17.221 47.193,17.221 46.45,16.478 U3.23
  Bottom Layer w0.254: v1(1.346,19.463) 2.18,18.63 2.18,8.419 2.256,8.343 2.256,8.32 v1(2.489,8.087)
CS_MEM3: R17_FLASH3.1 U3.24 U4_FLASH3.1 | length 85
  Top Layer w0.254: v1(1.481,13.417) 2.196,13.417 R17_FLASH3.1 4.403,13.298 U4_FLASH3.1 ; v1(1.676,8.103) 1.676,7.576 0.965,6.864 0.965,6.151 0.977,6.139 0.977,2.972 3.406,0.543 49.53,0.543 50.394,1.406 50.394,16.12 49.643,16.87 49.63,16.87 49.291,17.21 49.291,17.222 48.886,17.628 47.025,17.628 46.675,17.278 U3.24
  Bottom Layer w0.254: v1(1.481,13.417) 1.773,13.125 1.773,8.199 v1(1.676,8.103)
CS_RTC: R1.1 U3.26 U5.1 | length 42
  Top Layer w0.254: R1.1 13.32,10.377 U5.1 13.919,10.643 14.986,11.709 19.517,11.709 19.948,12.141 22.555,12.141 v1(22.733,12.319) ; v1(29.235,18.344) 29.388,18.496 29.388,19.329 31.75,21.692 42.139,21.692 43.402,20.428 U3.26
  Bottom Layer w0.254: v1(22.733,12.319) 22.733,16.018 23.258,16.543 24.371,16.543 25.887,18.059 27.534,18.059 27.834,18.359 29.22,18.359 v1(29.235,18.344)
EPS: R18.2 U3.17 | length 50.7
  Top Layer w0.254: v1(45.702,10.828) U3.17
  Bottom Layer w0.254: R18.2 11.778,6.571 10.727,5.52 10.727,1.973 12.116,0.584 43.586,0.584 44.791,1.788 44.791,9.916 v1(45.702,10.828)
GND: C1.1 C2.1 C3.1 C4.1 C5.1 C6.1 C7.2 C8.1 C9.1 C10_FLASH1.2 C10_FLASH2.2 C10_FLASH3.2 C14.1 D1.2 D2.2 D3.2 D4.2 D5.2 D6.2 DEBUG1.7 DEBUG1.14 DEBUG1.15 OBC1.5 OBC2.1 OBC3.5 OBC4.1 OBC4.5 P1.6 R14.1 R24.1 R31.1 S2.2 U1.3 U2.8 U3.5 U3.20 U4_FLASH1.4 U4_FLASH2.4 U4_FLASH3.4 U5.2 U5.7 U5.8 U5.9 U5.10 U5.11 U5.12 U5.13 U5.14 U5.15 U6.1 U7.4 Y1.2 Y1.4 | length 80
  Top Layer w0.254: v1(1.191,9.243) C10_FLASH3.2 4.423,9.243 U4_FLASH3.4 ; v1(1.248,15.196) C10_FLASH2.2 2.522,15.196 2.794,15.469 U4_FLASH2.4 ; v1(1.264,21.52) C10_FLASH1.2 4.375,21.52 U4_FLASH1.4 ; v1(15.113,7.671) C1.1 ; U5.2 15.189,8.876 C1.1@16.242,7.823 ; v1(20.244,26.213) 20.244,26.628 R31.1 ; U5.15 U5.14 U5.13 ; v1(21.539,9.83) U5.7 U5.8 U5.9 U5.10 ; v1(22.784,20.777) 22.784,19.103 U5.13 ; S2.2@24.384,32.206 v1(26.035,32.206) S2.2@27.584,32.206 ; U5.11 U5.12 U5.13 ; U1.3 C2.1@29.7,11.64 ; C2.1@29.707,11.633 C2.1@29.7,11.64 ; v1(30.39,11.278) 30.009,11.659 C2.1 C2.1@29.7,11.64 ; C5.1 35.733,14.078 U3.5 ; v1(37.878,7.017) Y1.4 ; v1(39.116,12.548) v1@39.141,12.573 ; v1(40.456,5.658) Y1.2 ; v1@40.792,14.529 40.869,14.605 v1(40.894,14.605) ; v1(42.367,25.121) 42.522,25.275 U7.4 ; C4.1 51.698,23.301 v1(51.994,23.597) ; D4.2 v1(53.815,17.239) D1.2 D3.2
  GND w0.254: 7.4,7.8 7.4,8 ; 19.919,33 20.066,33.147
  Bottom Layer w0.254: v1(8.72,8.451) OBC3.5 ; OBC1.5@8.73,20.124 OBC1.5 v1(8.73,26.449) ; OBC4.5@21.102,12.954 21.28,12.776 OBC4.5@21.294,12.79 ; OBC4.5@21.43,10.254 OBC4.5 ; OBC4.1 v1(31.59,15.248) ; v1(31.607,19.357) OBC2.1 ; U6.1@37.276,26.543 37.276,27.127 C3.1 38.336,27.483 v1(38.544,27.691) ; C9.1 v1(39.116,12.548) ; v1(40.03,12.522) 40.03,8.788 40.513,8.306 C8.1 ; R24.1 v1(46.987,27.937) ; v1(51.879,20.765) R14.1 ; v1(51.892,14.681) 52.694,14.681 C14.1 ; U2.8 58.943,20.414 v1(59.182,20.414)
  other v1: 39.98,14.58
INTRPT_RTC: R20.1 U3.27 U5.5 | length 37.6
  Top Layer w0.254: R20.1 20.689,7.535 18.999,9.225 U5.5 18.999,10.617 20.117,11.735 25.112,11.735 v1(25.273,11.895) ; v1(26.848,16.967) 27.127,16.688 28.415,16.688 29.82,18.092 29.82,19.186 31.918,21.285 41.885,21.285 42.602,20.568 U3.27
  Bottom Layer w0.254: v1(25.273,11.895) 25.273,16.064 25.922,16.713 26.69,16.713 26.848,16.871 v1(26.848,16.967)
LED1: D1.1 R32.1 | length 1.4
  Top Layer w0.254: D1.1 R32.1
LED2: D2.1 R9.1 | length 1.4
  Top Layer w0.254: D2.1 56.733,19.637 R9.1
LED3: D3.1 R10.1 | length 1.4
  Top Layer w0.254: D3.1 R10.1
LED4: D4.1 R11.1 | length 1.7
  Top Layer w0.254: D4.1 55.602,13.335 56.494,13.335 R11.1
LED5: D5.1 R12.1 | length 1.5
  Top Layer w0.254: D5.1 R12.1
LED6: D6.1 R13.1 | length 1.4
  Top Layer w0.254: D6.1 R13.1
LED_1: U2.14 U3.29 | length 20.6
  Top Layer w0.254: U3.29@41.037,18.743 41.037,17.494 v1(41.178,17.353)
  Bottom Layer w0.254: v1(41.178,17.353) 41.986,18.161 47.067,18.161 49.08,20.174 50.106,20.174 51.645,18.635 51.645,18.631 52.146,18.131 54.389,18.131 55.185,17.335 U2.14
MISO: DEBUG1.10 U3.8 U4_FLASH1.2 U4_FLASH2.2 U4_FLASH3.2 U5.19 U7.5 | length 91.2
  Top Layer w0.254: U4_FLASH1.2 5.994,24.155 v1(6.147,24.308) ; U4_FLASH2.2 5.512,18.009 v1(6.147,18.644) ; U4_FLASH3.2 5.393,11.895 v1(6.096,12.598) 6.096,13.709 8.541,16.154 14.63,16.154 ; U5.19 14.63,18.518 14.63,16.154 ; v1(37.313,10.897) 37.102,11.107 U3.8 36.173,11.678 35.968,11.882 35.152,11.882 35.131,11.862 32.56,11.862 29.36,15.062 22.408,15.062 21.315,16.154 14.63,16.154 ; U7.5 45.074,24.625 45.288,24.411 v1(45.288,24.282)
  Bottom Layer w0.254: v1(6.096,12.598) 6.147,12.649 v1(6.147,18.644) v1(6.147,24.308) ; DEBUG1.10 35.66,3.453 34.62,4.493 34.62,7.547 35.41,8.336 35.419,8.336 36.274,9.192 ; v1(37.313,10.897) 37.216,10.8 37.216,10.133 36.274,9.192 ; v1(45.288,24.282) 45.314,24.257 45.314,22.016 44.126,20.828 41.637,20.828 41.223,20.414 41.223,19.658 40.183,18.618 38.786,18.618 36.652,16.485 36.652,13.31 34.473,11.13 34.473,9.8 34.646,9.627 35.585,9.627 36.02,9.192 36.274,9.192
MISO_A: OBC3.1 P1.1 U3.1 | length 46.2
  Top Layer w0.254: v1(18.974,14.58) 19.304,14.91 20.771,14.91 21.863,13.818 28.778,13.818 32.245,10.351 v1(33.071,10.351) ; v1(32.995,13.64) 32.995,16.485 33.788,17.278 U3.1
  Bottom Layer w0.254: P1.1 14.948,28.397 16.739,28.397 17.653,27.483 17.653,18.796 18.88,17.569 OBC3.1@18.88,14.58 ; v1(32.995,13.64) 33.071,13.564 v1(33.071,10.351)
MOSI: DEBUG1.9 U3.9 U4_FLASH1.5 U4_FLASH2.5 U4_FLASH3.5 U5.17 U7.6 | length 94.6
  Top Layer w0.254: v1(7.391,8.636) 8.111,9.355 U4_FLASH3.5 ; v1(7.468,14.249) 7.468,14.326 8.611,15.469 9.706,15.597 9.736,15.594 10.668,15.594 10.822,15.748 21.112,15.748 22.23,14.63 29.217,14.63 32.392,11.455 35.299,11.455 35.32,11.476 35.8,11.476 36.636,10.64 36.636,10.414 36.948,10.102 ; v1(7.518,21.336) 7.798,21.615 U4_FLASH1.5 ; U4_FLASH1.5@9.839,21.606 10.998,20.447 13.513,20.447 13.513,20.464 14.106,21.057 16.17,21.057 16.87,20.357 16.875,20.357 17.039,20.193 17.039,20.188 17.729,19.498 U5.17 ; v1(35.281,9.017) 35.489,9.017 36.573,10.102 36.948,10.102 ; U3.9@38.627,10.102 36.948,10.102 ; U7.6 44.528,23.975 v1(44.653,23.851)
  Bottom Layer w0.254: v1@7.341,14.376 v1@7.391,14.376 ; v1(7.391,8.636) 7.437,8.682 7.437,9.638 7.391,9.684 v1@7.391,14.376 ; v1@7.391,21.311 v1@7.391,14.376 ; v1(7.468,14.249) 7.468,14.3 v1@7.391,14.376 ; DEBUG1.9 33.12,3.199 34.214,4.293 34.214,7.95 v1(35.281,9.017) 34.671,9.017 34.066,9.622 34.066,11.333 36.246,13.513 36.246,16.662 36.255,16.662 38.617,19.025 40.014,19.025 40.816,19.826 40.816,20.582 41.537,21.303 44.026,21.303 44.653,21.93 v1(44.653,23.851)
MOSI_A/TX: DEBUG1.5 OBC2.5 P1.4 P2.2 P2.4 U2.4 U3.2 | length 110.5
  Top Layer w0.254: v1(18.618,28.804) 19.126,29.312 v1(29.489,29.312) ; v1(22.987,4.648) 23.617,5.278 25.894,5.278 26.346,4.826 33.96,4.826 35.255,6.121 v1(35.255,6.223) ; U3.2 38.615,16.478 v1(39.014,16.078) ; v1(41.427,28.651) 42.24,28.651 43.789,30.2 P2.4 ; v1(49.835,19.355) 50.394,19.914 50.394,20.92 52.333,22.86 54.432,22.86 v1(55.22,23.647)
  Bottom Layer w0.254: P1.4 14.173,31.9 14.173,29.947 15.316,28.804 v1(18.618,28.804) 19.126,28.804 21.447,26.483 OBC2.5 ; DEBUG1.5 22.96,4.621 v1(22.987,4.648) ; v1(29.489,29.312) 30.531,28.27 38.782,28.27 39.163,28.651 v1(41.427,28.651) ; v1(35.255,6.223) 35.158,6.32 35.158,7.504 35.498,7.844 35.514,7.844 37.892,10.222 37.892,11.137 37.871,11.157 37.871,14.122 39.014,15.265 v1(39.014,16.078) 41.046,16.078 42.723,17.755 47.396,17.755 48.908,19.267 49.715,19.267 49.803,19.355 v1(49.835,19.355) ; P2.4 P2.2 49.87,30.2 55.22,24.851 55.22,22.357 55.835,21.741 U2.4 ; v1(55.22,23.647) 55.037,23.647 v1@55.22,23.83
NetC3_2: C3.2 R3.1 U6.7 U6.8 | length 2.5
  Bottom Layer w0.254: R3.1 36.206,27.457 C3.2 36.232,26.216 U6.7@36.26,26.187
NetC6_2: C6.2 R15.1 U3.19 | length 3.8
  Top Layer w0.254: U3.19 45.702,13.208 47.15,13.208 47.676,12.682 C6.2 47.726,12.437 R15.1
NetC7_1: C7.1 U3.21 | length 2.8
  Top Layer w0.254: U3.21 46.52,14.878 46.812,15.17 46.812,15.595 C7.1
NetC11_2: C11.2 C12.2 C13.1 U8.2 | length 10.8
  Top Layer w0.254: C11.2@14.224,24.489 v1(15.037,24.489) 17.336,24.489 U8.2@17.39,24.435 ; U8.2 21.023,24.359 21.603,23.779 23.933,23.779 C13.1
NetC13_2: C13.2 R25.2 R29.2 | length 3.4
  Top Layer w0.254: R29.2 25.439,24.167 26.1,23.506 C13.2 26.201,22.912 R25.2
NetR4_1: R4.1 U3.14 U7.14 | length 28
  Top Layer w0.254: U3.14 42.602,11.36 v1(42.672,11.43) ; v1(50.16,18.593) 49.756,18.593 47.523,20.825 47.523,24.927 48.522,25.925 U7.14 49.403,25.883 v1(50.724,25.883)
  Bottom Layer w0.254: v1(42.672,11.43) 42.855,11.43 42.855,16.033 43.711,16.89 48.457,16.89 v1(50.16,18.593) ; R4.1 50.546,25.705 v1(50.724,25.883)
NetR5_1: R5.1 U3.32 U7.2 | length 23.2
  Top Layer w0.254: v1(38.602,17.532) U3.32 ; v1(42.037,26.822) 42.284,26.575 U7.2 44.655,26.575 46.711,24.52 46.711,20.142 v1(47.142,19.71)
  Bottom Layer w0.254: v1(38.602,17.532) 38.602,17.603 39.211,18.212 40.443,18.212 41.205,18.974 46.406,18.974 v1(47.142,19.71) ; v1(42.037,26.822) 43.738,26.822 R5.1
NetR6_1: R6.1 U3.13 U7.3 | length 28.1
  Top Layer w0.254: v1(41.763,11.442) 41.763,10.217 U3.13 ; v1(42.062,25.933) 43.452,25.933 U7.3 43.478,25.908 44.748,25.908 46.228,24.428 46.228,19.805 47.822,18.212 v1(48.743,18.212)
  Bottom Layer w0.254: v1(41.763,11.442) 42.448,12.127 42.448,16.464 43.307,17.323 47.879,17.323 48.743,18.186 v1(48.743,18.212) ; v1(42.062,25.933) 42.277,25.719 R6.1
NetR14_2: R14.2 U2.1 U2.15 | length 9.3
  Top Layer w0.254: v1(52.781,15.646) v1(52.781,19.939) v1@52.781,20.015
  Bottom Layer w0.254: v1(52.781,15.646) 54.449,15.646 54.535,15.561 U2.15 ; v1(52.781,19.939) R14.2 53.244,19.265 U2.1
NetR24_2: R24.2 U3.15 U7.15 | length 28.5
  Top Layer w0.254: U3.15 43.434,10.21 v1(43.434,11.278) ; v1(49.87,17.45) 49.87,17.904 47.117,20.657 47.117,25.095 48.597,26.575 U7.15 50.197,26.575 50.597,26.975 v1(50.775,26.975)
  Bottom Layer w0.254: v1(43.434,11.278) 43.388,11.324 43.388,15.992 43.88,16.483 48.625,16.483 49.592,17.45 v1(49.87,17.45) ; R24.2 48.538,26.975 v1(50.775,26.975)
NetR26_1: R26.1 U8.4 | length 5.7
  Top Layer w0.254: R26.1 12.687,21.895 U8.4@17.39,21.895
NetR26_2: R26.2 U3.7 | length 29.2
  Top Layer w0.254: R26.2 11.989,18.448 v1(12.014,18.422) ; v1@15.542,17.37 16.351,16.561 21.498,16.561 22.59,15.469 29.528,15.469 32.06,12.937 32.728,12.268 34.963,12.268 34.983,12.289 35.987,12.289 36.176,12.478 U3.7 U3.7@36.983,12.359
  Bottom Layer w0.254: v1(12.014,18.422) 13.038,17.399 v1(15.57,17.399)
NetR27_1: R27.1 U8.1 | length 2.6
  Top Layer w0.254: R27.1 14.824,25.705 U8.1@17.39,25.705
NetR27_2: R27.2 U3.6 | length 34.6
  Top Layer w0.254: v1(12.598,24.765) 12.598,24.979 R27.2 ; v1(16.586,17.145) 16.764,16.967 21.666,16.967 22.758,15.875 29.696,15.875 32.889,12.682 34.802,12.682 34.815,12.695 35.795,12.695 36.378,13.278 U3.6
  Bottom Layer w0.254: v1(12.598,24.765) 12.598,18.583 13.198,17.983 15.805,17.983 16.586,17.202 v1(16.586,17.145)
NetR28_1: R28.1 U8.5 | length 4.4
  Top Layer w0.254: U8.5 24.114,20.523 26.047,20.523 R28.1
NetR28_2: R28.2 U3.30 | length 17.1
  Top Layer w0.254: R28.2 28.883,20.041 31.346,22.504 39.776,22.504 v1(39.954,22.682) ; U3.30 40.234,18.81 v1(40.234,20.295)
  Bottom Layer w0.254: v1(39.954,22.682) 40.234,22.403 v1(40.234,20.295)
NetR30_1: R30.1
NetR30_2: R30.2 R31.2 U8.8 | length 6.7
  Top Layer w0.254: R31.2 22.59,26.585 U8.8@22.59,25.705 ; U8.8 23.631,26.441 27.424,26.441 R30.2@27.596,26.269
NetS1_6: S1.6 S2.1 | length 9.4
  Top Layer w0.254: S2.1@24.384,30.556 27.584,30.556 31.903,30.556 S1.6@33.249,29.21
OUT1: R32.2 U2.3 | length 6.4
  Top Layer w0.254: R32.2 58.375,17.874 v1(59.182,17.874)
  Bottom Layer w0.254: U2.3 55.185,19.673 55.118,19.606 55.118,19.029 55.765,18.382 58.674,18.382 v1(59.182,17.874)
OUT2: R9.2 U2.5 | length 5.3
  Top Layer w0.254: R9.2@58.293,19.525 58.248,19.57 R9.2 59.055,19.652 v1(59.182,19.525)
  Bottom Layer w0.254: U2.5 56.485,19.174 56.811,18.848 59.013,18.848 59.182,19.017 v1(59.182,19.525)
OUT3: R10.2 U2.7 | length 3.6
  Top Layer w0.254: R10.2 v1(59.182,21.303)
  Bottom Layer w0.254: U2.7 57.785,21.115 57.973,21.303 v1(59.182,21.303)
OUT4: R11.2 U2.9 | length 2.5
  Top Layer w0.254: R11.2 58.408,12.921 58.702,12.921 58.928,13.147 v1(59.055,13.147)
  Bottom Layer w0.254: U2.9 58.435,13.894 59.055,13.274 v1(59.055,13.147)
OUT5: R12.2 U2.11 | length 4.4
  Top Layer w0.254: R12.2 v1(59.182,14.699)
  Bottom Layer w0.254: U2.11 57.135,15.126 57.54,15.531 58.858,15.531 59.182,15.207 v1(59.182,14.699)
OUT6: R13.2 U2.13 | length 5.5
  Top Layer w0.254: R13.2 v1(59.182,16.35)
  Bottom Layer w0.254: U2.13 55.835,15.337 56.435,15.937 58.769,15.937 v1(59.182,16.35)
PAY: R19.2 U3.18 | length 49.6
  Top Layer w0.254: v1(44.57,12.478) U3.18
  Bottom Layer w0.254: R19.2 11.725,5.298 11.133,4.707 11.133,2.142 12.284,0.991 43.418,0.991 44.374,1.946 44.374,10.074 44.57,10.271 v1(44.57,12.478)
PROG_RST: P1.5 S1.4 | length 22.4
  Top Layer w0.254: P1.5@18.293,30.536 P1.5 18.047,30.378 22.587,30.378 23.425,31.217 36.906,31.217 38.329,29.794 S1.4@38.329,29.21
RST_EPS: OBC3.3 R18.1 | length 7.3
  Bottom Layer w0.254: R18.1 13.494,11.816 OBC3.3 ; OBC3.3@13.767,9.398 13.81,9.441 OBC3.3@13.81,10.998
RST_OBC: OBC3.4 R33.1 S1.5 U2.2 U3.31 | length 81.2
  Top Layer w0.254: v1(11.455,14.63) 12.167,15.342 20.944,15.342 22.061,14.224 29.007,14.224 32.182,11.049 35.179,11.049 35.433,10.795 35.535,10.897 v1(35.56,10.897) ; v1(39.402,17.583) U3.31
  Bottom Layer w0.254: v1(35.56,10.897) 35.56,10.871 37.059,12.37 37.059,15.348 37.968,16.257 38.305,16.257 39.402,17.355 v1(39.402,17.583) 40.443,17.583 41.427,18.567 46.898,18.567 48.956,20.625 50.23,20.625 52.052,18.803 52.052,18.799 52.314,18.537 54.221,18.537 54.535,18.851 U2.2 54.504,19.937 54.504,24.992 50.336,29.159 42.316,29.159 40.869,30.607 37.821,30.607 36.424,29.21 S1.5@35.789,29.21
RST_PAY: OBC3.2 R19.1 | length 9
  Bottom Layer w0.254: R19.1 15.23,5.298 16.34,6.408 OBC3.2
RSTn_IN: U1.4 U5.6 | length 8.7
  Top Layer w0.254: U5.6 20.269,10.744 20.726,11.201 26.678,11.201 U1.4
RSTn_RTC: R2.1 U1.2 U3.3 | length 14.7
  Top Layer w0.254: U1.2 30.39,9.779 R2.1 31.076,10.465 31.77,9.771 34.308,9.771 34.849,10.312 v1(35.052,10.312) ; U3.3 v1(38.208,15.678)
  Bottom Layer w0.254: v1(35.052,10.312) 35.052,10.109 35.108,10.054 35.581,10.054 37.465,11.938 37.465,14.935 v1(38.208,15.678)
RX: P2.1 P2.3 S1.3 | length 16.1
  Top Layer w0.254: S1.3@33.249,32.512 34.544,33.807 44.033,33.807 45.101,32.74 P2.3 P2.1
SCK: DEBUG1.8 U3.28 U4_FLASH1.6 U4_FLASH2.6 U4_FLASH3.6 U5.18 U5.20 U7.11 | length 103.3
  Top Layer w0.254: v1(6.807,15.24) 8.306,16.739 U4_FLASH2.6 9.899,16.561 13.208,16.561 13.919,17.272 U5.20 13.919,20.295 14.274,20.65 16.002,20.65 16.459,20.193 U5.18 16.459,18.161 17.247,17.374 21.92,17.374 23.012,16.281 28.583,16.281 30.226,17.924 30.226,19.018 32.087,20.879 41.097,20.879 v1(41.802,20.174) U3.28 ; v1(7.01,21.895) 7.061,21.895 8.052,22.885 U4_FLASH1.6 ; U4_FLASH3.6 8.085,10.625 v1(6.858,9.398) 6.812,9.352 6.812,8.047 10.084,4.775 19.339,4.775 20.101,4.013 29.452,4.013 DEBUG1.8 ; v1(48.235,23.901) 48.309,23.975 U7.11
  Bottom Layer w0.254: v1@6.731,15.24 v1(6.807,15.24) ; v1(6.858,9.398) 6.858,21.742 v1(7.01,21.895) ; v1(41.802,20.174) 42.024,20.396 47.193,20.396 47.981,21.184 47.981,23.647 v1(48.235,23.901)
SCK_A: P1.3 S1.1 | length 25
  Top Layer w0.254: P1.3 16.379,29.507 18.316,29.507 18.7,29.891 30.096,29.891 v1(30.498,29.489)
  Bottom Layer w0.254: v1(30.498,29.489) 31.267,29.489 32.639,30.861 36.678,30.861 S1.1@38.329,32.512
SCK_A/RX: DEBUG1.6 OBC2.4 S1.2 U2.6 U3.12 | length 105.9
  Top Layer w0.254: v1(25.375,4.699) 25.654,4.699 25.933,4.42 34.646,4.42 35.89,5.664 35.89,7.112 v1(35.738,7.264) ; S1.2@35.789,32.512 36.186,32.512 37.964,30.734 43.637,30.734 v1(44.272,31.369) ; v1(40.996,12.522) 40.996,10.184 U3.12 41.002,9.43 41.389,9.042 47.694,9.042 v1(48.895,7.841) ; v1(51.046,7.841) 51.046,7.958 50.8,8.204 50.8,20.752 52.502,22.454 52.527,22.428 v1(57.023,22.428)
  Bottom Layer w0.254: OBC2.4 23.987,27.568 27.813,31.394 34.976,31.394 35.789,32.207 S1.2@35.789,32.512 ; v1(25.375,4.699) 25.5,4.574 DEBUG1.6 ; v1(35.738,7.264) 35.738,7.493 38.298,10.054 38.298,12.549 38.876,13.127 40.391,13.127 v1(40.996,12.522) ; v1(44.272,31.369) 49.276,31.369 57.135,23.51 U2.6 ; v1(48.895,7.841) v1(51.046,7.841)
SCL_+3V3: R8.1 R22.1 U6.3 U7.8 | length 12.1
  Top Layer w0.254: R22.1 40.821,24.554 v1(41.351,24.024) 41.351,23.381 42.057,22.675 U7.8
  Bottom Layer w0.2: U6.3 38.811,25.806 R8.1@38.964,25.959
  Bottom Layer w0.254: R8.1 39.294,26.162 39.653,25.803 39.653,24.267 39.895,24.024 v1(41.351,24.024)
SDA_+3V3: R7.1 R21.1 U6.4 U7.7 | length 12.9
  Top Layer w0.254: R21.1 40.64,26.01 42.342,24.308 v1(42.342,23.325) U7.7
  Bottom Layer w0.2: U6.4 38.434,25.451 38.786,25.099 R7.1@38.675,24.988
  Bottom Layer w0.254: R7.1 38.782,24.563 39.901,23.444 41.902,23.444 42.181,23.165 v1(42.342,23.325)
TRANS_EN_UHF: OBC4.3 U2.12 U3.25 | length 45.4
  Top Layer w0.254: v1(28.281,17.374) 28.281,18.865 31.515,22.098 42.469,22.098 44.202,20.365 U3.25 44.12,18.696 v1(44.12,15.904)
  Bottom Layer w0.254: OBC4.3 26.51,15.639 28.245,17.374 v1(28.281,17.374) ; v1(44.12,15.904) 44.293,16.077 48.532,16.077 52.111,12.498 55.551,12.498 56.485,13.432 U2.12
TRANS_EN_UHF_OPT: OBC4.4 U2.10 U3.22 | length 56.7
  Top Layer w0.254: v1(25.4,7.696) 25.4,7.772 25.329,7.844 35.978,7.844 36.379,7.442 36.347,7.442 v1(36.347,4.039) ; v1(44.323,15.138) 44.323,15.189 44.812,15.678 U3.22
  Bottom Layer w0.254: OBC4.4 24.206,11.874 24.206,8.966 25.4,7.772 v1(25.4,7.696) ; v1(36.347,4.039) 43.256,4.039 43.942,4.724 43.942,10.439 44.069,10.566 44.069,11.76 43.917,11.913 43.917,14.732 v1(44.323,15.138) 44.855,15.671 48.363,15.671 51.942,12.092 56.2,12.092 57.785,13.677 U2.10
TRANS_I2C_SCL: DEBUG1.3 OBC1.2 R16.1 R22.2 U6.6 | length 50.5
  Top Layer w0.254: v1(16.739,27.432) 18.641,27.432 19.479,28.27 32.258,28.27 v1(34.392,26.137) 34.392,25.417 35.546,24.262 36.829,24.262 R22.2
  GND w0.254: DEBUG1.3 DEBUG1.3@17.88,2.92
  Bottom Layer w0.2: R16.1 35.345,25.806 U6.6
  Bottom Layer w0.254: v1(16.739,27.432) 16.739,26.619 16.35,26.231 OBC1.2 16.35,19.185 17.786,17.749 17.786,3.952 17.628,3.794 17.628,3.137 DEBUG1.3 ; v1(34.392,26.137) 34.417,26.162 R16.1
TRANS_I2C_SDA: DEBUG1.4 OBC1.3 R21.2 R23.1 U6.5 | length 57.2
  Top Layer w0.254: v1(15.113,27.788) 15.55,28.224 18.858,28.224 19.311,28.677 32.433,28.677 32.84,28.27 33.077,28.27 36.21,25.137 R21.2 ; v1(17.12,4.115) 19.19,4.115 DEBUG1.4
  Bottom Layer w0.2: R23.1 35.548,25.451 U6.5
  Bottom Layer w0.254: v1(15.113,27.788) 15.011,27.788 13.81,26.586 OBC1.3 13.81,19.235 14.656,18.39 16.535,18.39 17.379,17.546 17.379,4.121 17.374,4.115 v1(17.12,4.115) ; v1(36.17,24.841) 36.17,25.335 U6.5@36.26,25.425
XTAL1: C9.2 U3.10 Y1.1 | length 7.6
  Top Layer w0.254: v1(39.287,5.658) Y1.1 39.402,7.182 U3.10
  Bottom Layer w0.254: C9.2 39.287,6.495 v1(39.287,5.658)
XTAL2: C8.2 U3.11 Y1.3 | length 5.8
  Top Layer w0.254: U3.11 40.202,9.149 41.293,8.058 Y1.3 v1(41.878,6.826)
  Bottom Layer w0.254: C8.2 41.718,6.666 v1(41.878,6.826)
pads on no net: U1.1 U5.3 U7.1 U7.9 U7.10 U7.13 U7.16

## Polygon pours and split planes (outlines as drawn)
GND on Top Layer "32M1_GND" (solid, pour order 2): 41.002,10.973 38.282,10.973 37.85,11.405 36.601,11.405 36.449,11.557 36.449,16.561 38.648,16.561 40.096,18.009 43.612,18.034 43.803,17.843 43.803,15.862 45.009,14.656 46.482,14.656 46.482,12.649 41.191,12.649 40.711,12.168 41.002,11.877
+3V3 on Top Layer "+3V3_L01_P012" (solid, pour order 12): 10.744,25.73 8.077,25.73 5.512,23.165 3.378,23.165 3.378,22.581 7.29,22.581 8.585,23.876 10.77,23.876 10.77,25.705
+3V3 on Top Layer "+3V3_L01_P016" (solid, pour order 16): 10.795,13.453 8.128,13.453 5.563,10.888 3.429,10.888 3.429,10.304 7.341,10.304 8.636,11.599 10.82,11.599 10.82,13.428
+3V3 on Top Layer "+3V3_L01_P014" (solid, pour order 14): 10.795,19.59 8.128,19.59 5.563,17.025 3.429,17.025 3.429,16.44 7.341,16.44 8.636,17.736 10.82,17.736 10.82,19.565
GND on Top Layer "Top Layer-GND" (solid, pour order 4): 44.8,13.705 44.81,13.716 47.088,13.716 47.088,13.4 47.511,13.386 48.184,13.364 48.184,15.443 47.088,15.443 47.088,14.459 44.8,14.451
GND on GND "GND-GND" (solid, pour order 0): 0,35 60,35 60,0 0,0
+3V3 on +3V3 "+3V3-+3V3" (solid, pour order 10): 0.508,34.544 59.436,34.544 59.436,0.762 0.508,0.762

## Keep-outs
GND:
  rectangle: 40.163,12.167 40.869,12.878
  rectangle: 38.608,11.049 41.021,12.065

## Silkscreen, mask and mechanical layers (free items; w line width, h text height)
Top Overlay:
  lines w0.254: 13,29.19 13.01,29.19 13.8,28.4 17.4,28.4 18.2,29.2
  text "RX" at 50.189,32.147 h0.75
  text "PGM" at 8.839,31.09 h0.75
  text "TX" at 50.19,29.667 h0.75
  text "RST" at 24.892,28.428 h0.75
  text "RUN<->PGM" at 32.479,26.85 h0.75
  text "RX" at 53.084,24.943 h0.75
  text "R17" at 1.118,24.157 h0.75 r90
  text "TX" at 53.01,23.698 h0.75
  text "RST" at 53.162,22.479 h0.75
  text "LED1" at 53.035,11.1 h0.75
  text "UHF" at 53.01,9.83 h0.75
  text "UHF_OPT" at 53.035,8.611 h0.75
  text "MISO" at 33.985,4.623 h0.75
  text "CANL" at 14.097,4.575 h0.75
  text "SDA" at 19.431,4.576 h0.75
  text "SCK" at 29.489,4.575 h0.75
  text "RX" at 24.867,4.55 h0.75
  text "CANH" at 11.433,0.497 h0.75
  text "SCL" at 17.043,0.461 h0.75
  text "TX" at 22.276,0.458 h0.75
  text "3V3" at 42.266,0.426 h0.75
  text "GND" at 46.279,0.375 h0.75
  text "GND" at 27,0.359 h0.75
  text "MOSI" at 31.801,0.354 h0.75
  text "VBAT" at 36.576,0.346 h0.75
  text "+5" at 39.751,0.219 h0.75
Bottom Overlay:
  text "HERON MK II" at 43.409,15.011 h0.75
  text "OBC V2" at 43.383,13.343 h0.75
  text "!" at 51.453,11.406 h15
Route Tool Path:
  the board outline again, w0.254